# Altium PCB Switch.PcbDoc
Units mil, origin at the board's own origin, x right, y up, seen from the top; angles counter-clockwise.
Board outline 915 x 780 mil, 2 copper layers (Top Layer, Bottom Layer); 11 components, 9 nets, 48 pads, 14 vias.
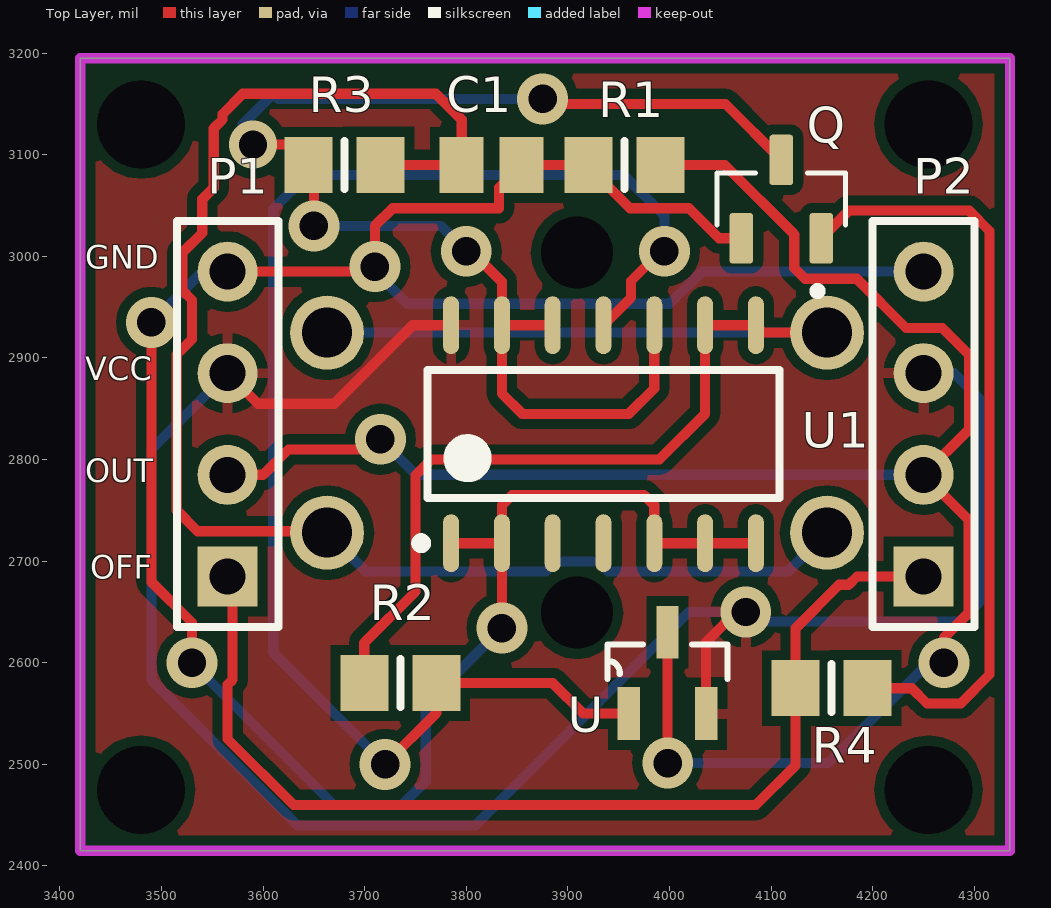
[diagram p0: Top Layer view]
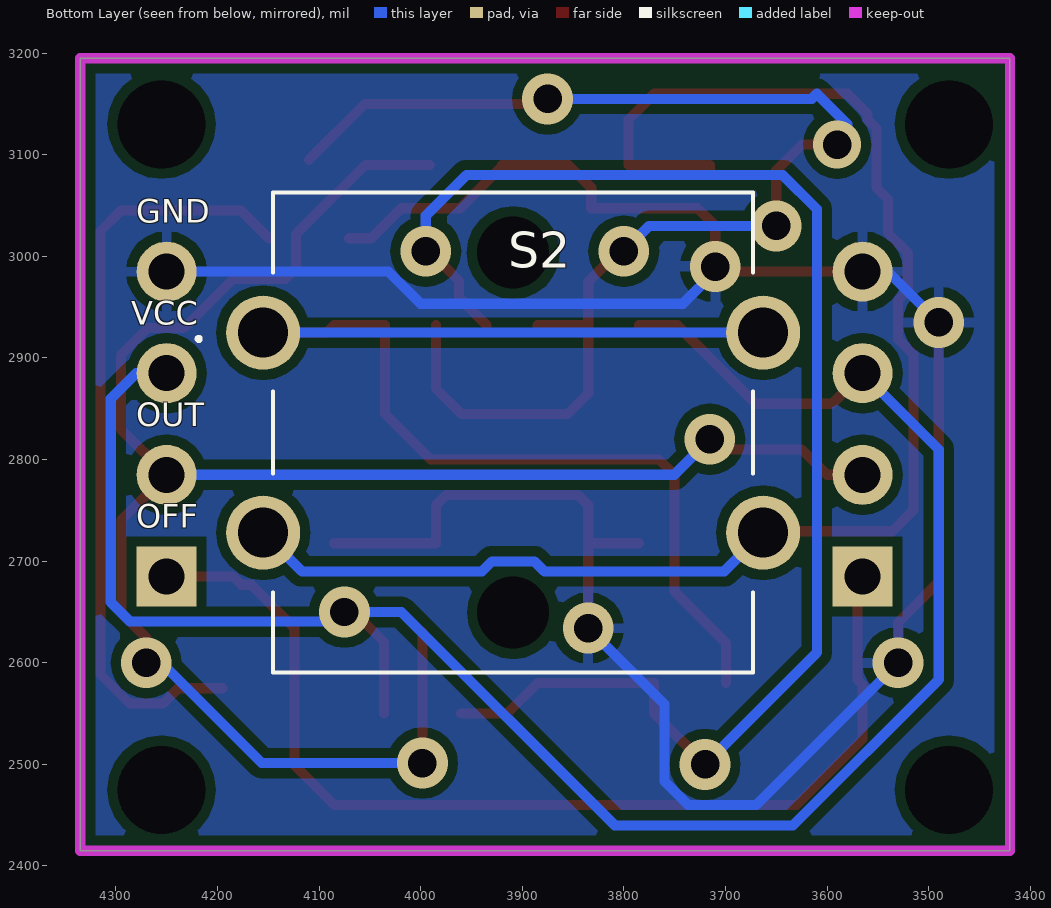
[diagram p1: Bottom Layer view, seen from below]

## Layer stack, top to bottom
Top Solder: solder mask 0.4, Solder Resist, Dk 3.5
Top Layer: signal copper 1.4
Dielectric 1: dielectric 12.6, FR-4, Dk 4.8
Bottom Layer: signal copper 1.4
Bottom Solder: solder mask 0.4, Solder Resist, Dk 3.5

## Board outline
3420,2415 4335,2415 4335,3195 3420,3195

## Design rules (kind name [scope] priority, off if disabled: settings)
Clearance [All] p1: gap=10
PolygonConnect [All] p1: connectstyle=Relief reliefconductorwidth=10 reliefentries=4 polygonreliefangle="90 Angle" airgapwidth=10
RoutingVias [All] p1: holewidth=28 width=50 viastyle="Through Hole" minholewidth=28 minwidth=50 maxholewidth=28 maxwidth=50
SolderMaskExpansion [All] p1: expansion=4
Width [All] p1: maxlimit=10 minlimit=10 preferedwidth=10
30 further rules are at their usual default settings.

## Components (designator, comment, footprint, x,y, rotation, side; value= is the part's Value field where it differs from the comment)
C1 "Cap Semi" C0805 3825,3090 r180 top
P1 "Header 4" HDR1X4 3565,2685 r90 top
P2 "Header 4" HDR1X4 4250,2685 r90 top
Q "BC847B" SOT100P230X110-3N 4110,3056.42 r180 top
R1 "Res3" 6-0805_N 3955.43,3090 r0 top
R2 "Res3" 6-0805_N 3735,2580 r0 top
R3 "Res3" 6-0805_N 3680,3090 r0 top
R4 "Res3" 6-0805_N 4159.57,2575 r0 top
S2 "B3F-1000" B3F4050 3908.94,2826.57 r0 bottom
U "DMG3415U-7" SOT95P240X105-3N 3998,2590 r90 top
U1 "MC14093B" SOP127P600X175-14N 3935,2825 r90 top

## Footprints (in the part's own frame and the unit in brackets; to place one, negate y for a bottom-side part, rotate by r counter-clockwise, add the part's x,y. Pads: shape width x height; smd on the part's side, far side on the other; paste and mask are expansions set on the pad)
6-0805_N [mm] "Chip Resistor, Body 2.0x1.2mm, IPC Medium Density"
  rect 1.2x1.4 smd: 1(-0.9,0) 2(0.9,0)
  silkscreen extent 0,-0.6 0,0.6, body extent -1.07,-0.7 1.07,0.7, height 0.7
B3F4050 [mm]
  round 1.85 hole 1.25: 1(6.25,-2.5) 2(-6.25,-2.5) 3(6.25,2.5) 4(-6.25,2.5)
  round 0.9 hole 1.8 unplated: 5(0,4.5) 6(0,-4.5)
  silkscreen extent -6,-6 7.91,6
C0805 [mm] "Chip Capacitor, Body 2.0x1.3mm, IPC High Density"
  rect 1.1x1.4 smd: 1(-0.75,0) 2(0.75,0)
  body extent -1.1,-0.72 1.1,0.72, height 1.4
HDR1X4 [mm] "Connector; Header; 4 Position"
  rect 1.5x1.5 hole 0.9: 1(0,0)
  round 1.5 hole 0.9: 2(2.54,0) 3(5.08,0) 4(7.62,0)
  silkscreen extent -1.27,-1.27 8.89,1.27
SOP127P600X175-14N [mm] "SOP, 14-Leads, Body 8.65x3.90mm, Pitch 1.27mm, IPC Medium Density"
  oval 1.45x0.4 smd: "IN 1A"(-2.725,3.81) "IN 1B"(-2.725,-1.27) "IN 1C"(2.725,-3.81) "IN 1D"(2.725,1.27) "IN 2A"(-2.725,2.54) "IN 2B"(-2.725,-2.54) "IN 2C"(2.725,-2.54) "IN 2D"(2.725,2.54) "OUT A"(-2.725,1.27) "OUT B"(-2.725,0) "OUT C"(2.725,-1.27) "OUT D"(2.725,0) VDD(2.725,3.81) VSS(-2.725,-3.81)
  silkscreen extent -2.85,-4.4 1.6,4.68, body extent -2,-4.4 2,4.4, height 1.75
SOT95P240X105-3N [mil]
  rect 52x22 smd: 1(-40,38) 2(-40,-38) 3(40,0)
  silkscreen extent -6,-59 28,59
SOT100P230X110-3N [mm]
  rrect25% 0.59x1.26 smd: 1(-1,0.98) 2(1,0.98) 3(0,-0.98)
  silkscreen extent -1.61,-0.65 1.61,2.4

## Part data
C1: "Capacitor (Semiconductor SIM Model)"
P1 P2: "Header, 4-Pin"
Q: "Bipolar (BJT) Transistor NPN 45V 100mA 100MHz 150mW Surface Mount SOT-523"
R1 R2 R3 R4: "Resistor"
S2: "Switch, FLUX TIGHT MECHANICAL KEYSwitch, , 50MA@24VDC, NO GROUND TERM., FLAT PLUNG"
U: "P-Channel 20V 4A _Ta_ 900mW _Ta_ Surface Mount SOT-23-3"
U1: "Quad 2-Input “NAND\"  Schmitt Trigger"

## Free pads (board coordinates)
  round 60 hole 86.61: 1(4255,2475) 2(4255,3130) 3(3480,3130) 4(3480,2475)

## Via types
v1: diameter 50, hole 28, Top Layer to Bottom Layer, 13 vias
v2: diameter 47.24, hole 28, Top Layer to Bottom Layer, 1 vias

## Nets (pads, with @x,y where several pads share a name; then routed paths per layer and width w, separated by ;. In a path a pad name is that pad's centre, name@x,y a point inside that pad or via, vN(x,y) a via of type N, cw(c..) or ccw(c..) an arc to the next point about the centre after c; other vN are vias at no path point)
GATE: "U1.OUT D" R2.2 U.1 | length 1450.4
  Top Layer w10: v1(3720,2500) 3770.43,2550.43 R2.2 3885,2580 3915,2550 U.1 ; 3935,2932.28 3962.13,2959.41 3962.13,2975.83 3995,3008.7 v1(3995,3005)
  Bottom Layer w10: v1(3720,2500) 3610,2610 3610,3046.57 3643.43,3080 3955,3080 3995,3040 v1(3995,3005)
GND: "U1.IN 1A" "U1.IN 1B" "U1.IN 2A" "U1.IN 2B" C1.1 P1.4 P2.4 Q.2 R1.1 U1.VSS | length 2579.6
  Top Layer w10: v1(3490,2935) 3490,2679.73 3530,2639.73 v1(3530,2600) ; P1.4 3705,2985 v1(3710,2990) 3710,3030 3727.44,3047.44 3767.61,3047.44 3832.13,3047.44 3832.13,3067.6 C1.1 R1.1 3920,3088.47 3961.03,3047.44 4019.13,3047.44 4048.73,3017.83 Q.2 ; 3785,2717.72 3835,2717.72 ; v1(3835,2634.13) 3835,2717.72 ; U1.VSS 4035,2717.72 3985,2717.72 3985,2755 3975,2765 3845,2765 3835,2755 3835,2717.72
  Bottom Layer w10: v1(3490,2935) 3540,2985 P1.4 ; v1(3530,2600) 3530,2599.74 3669.74,2460 3736.57,2460 3760,2483.43 3760,2559.13 v1(3835,2634.13) ; v1(3710,2990) 3710,2985.16 3741.85,2953.31 3999.88,2953.31 4031.57,2985 P2.4
KILL: P1.1 P2.1 R4.1 | length 1048.3
  Top Layer w10: P1.1 3570,2680 3570,2583.43 3565,2578.43 3565,2525 3630,2460 4085,2460 4124.13,2499.13 R4.1 4124.13,2634.13 4166.73,2676.73 4176.3,2676.73 4184.57,2685 P2.1
NetC1_2: C1.2 R3.2 S2.3 S2.4 | length 1491.5
  Top Layer w10: S2.4 3662.87,2729.53 3535.47,2729.53 3515,2750 3515,2903.43 3530,2918.43 3530,2957.03 3520.47,2966.56 3520.47,3003.44 3540,3022.97 3540,3056.22 3551.38,3067.6 3551.38,3126 3560,3134.62 3560,3140 3580,3160 3770,3160 3795.47,3134.53 C1.2 3720,3090 3715.43,3085.43 R3.2
  Bottom Layer w10: S2.4 3701.02,2690 3878.2,2690 3888.05,2699.84 3929.83,2699.84 3939.67,2690 4116.85,2690 S2.3
NetQ_1: Q.1 R4.2 | length 759.7
  Top Layer w10: Q.1 4176.54,3045 4295,3045 4315,3025 4315,2588.43 4286.57,2560 4253.43,2560 4238.43,2575 R4.2
NetQ_3: "U1.IN 1D" "U1.IN 2D" "U1.OUT C" Q.3 R3.1 | length 1327.3
  Top Layer w10: v2(3590,3110) 3624.57,3110 R3.1 3650,3084.57 v1(3650,3030) ; v1(3800,3005) 3800,3010 3835,2975 3835,2932.28 ; v1(3875,3155) 3875,3150 4055,3150 Q.3 ; 3885,2932.28 3835,2932.28 ; 3985,2932.28 3985,2870 3960,2845 3855,2845 3835,2865 3835,2932.28
  Bottom Layer w10: v2(3590,3110) 3590,3120 3580,3130 3610,3160 3615,3155 v1(3875,3155) ; v1(3650,3030) 3775,3030 v1(3800,3005)
NetR2_1: "U1.IN 1C" "U1.IN 2C" R2.1 S2.1 S2.2 | length 1237.9
  Top Layer w10: R2.1 3699.57,2619.57 3750,2670 3750,2784.57 3765.43,2800 3990,2800 4035,2845 4035,2932.28 4085,2932.28 4092.28,2925 S2.1
  Bottom Layer w10: S2.2 S2.1
OUT: P1.2 P2.2 R1.2 U.3 | length 1909.6
  Top Layer w10: P1.2 3600,2785 3625,2810 3705.43,2810 v1(3715.43,2820) ; R1.2 4054.39,3090 4122.76,3021.64 4122.76,2988.52 4133.24,2978.03 4184.25,2978.03 4232.76,2929.53 4268.44,2929.53 4295,2902.97 4295,2830 P2.2 4294.53,2740.47 4294.53,2649.26 4270,2624.73 v1(4270,2600) ; U.3 3998,2501.13 v1(3998.18,2501.32)
  Bottom Layer w10: v1(3715.43,2820) 3750.43,2785 P2.2 ; v1@4000,2503.13 v1(3998.18,2501.32) 4156.32,2501.32 4255,2600 v1(4270,2600)
VCC: P1.3 P2.3 U1.VDD U.2 | length 1962.2
  Top Layer w10: P1.3 3595,2855 3670,2855 3747.28,2932.28 U1.VDD ; U.2 4036,2620.41 4070.59,2655 4075,2650.59 v1(4075,2650)
  Bottom Layer w10: P1.3 3490,2810 3490,2583.43 3633.43,2440 3809,2440 4019,2650 v1(4075,2650) 4084.53,2640.47 4285.74,2640.47 4305,2659.73 4305,2860 4280,2885 P2.3
pads on no net: "U1.OUT A" "U1.OUT B" S2.5 S2.6

## Polygon pours and split planes (outlines as drawn)
GND on Bottom Layer "Buttom Layer-No Net" (solid, pour order 10): 3420,3195 3420,2415 4335,2415 4335,3195 3420,3195
VCC on Top Layer "Top Layer-No Net" (solid, pour order 8): 3420,3195 3420,2415 4335,2415 4335,3195 3420,3195

## Keep-outs
Top Layer:
  lines w10: 3420,2415 4335,2415 4335,3195 4181.3,3195 3930,3195 3420,3195 3420,2415
Bottom Layer:
  the board outline again, w10

## Silkscreen, mask and mechanical layers (free items; w line width, h text height)
Top Overlay:
  text "GND" at 3425,2980 h39.37
  text "VCC" at 3425,2870 h39.37
  text "OUT" at 3425,2770 h39.37
  text "OFF" at 3430,2675 h39.37
Bottom Overlay:
  text "GND" at 4280,3025 h39.37
  text "VCC" at 4285,2925 h39.37
  text "OUT" at 4280,2825 h39.37
  text "OFF" at 4280,2725 h39.37
Mechanical 1:
  the board outline again, w0